# EAGLE board weather-sensor-panel (EAGLE 9.4.2)
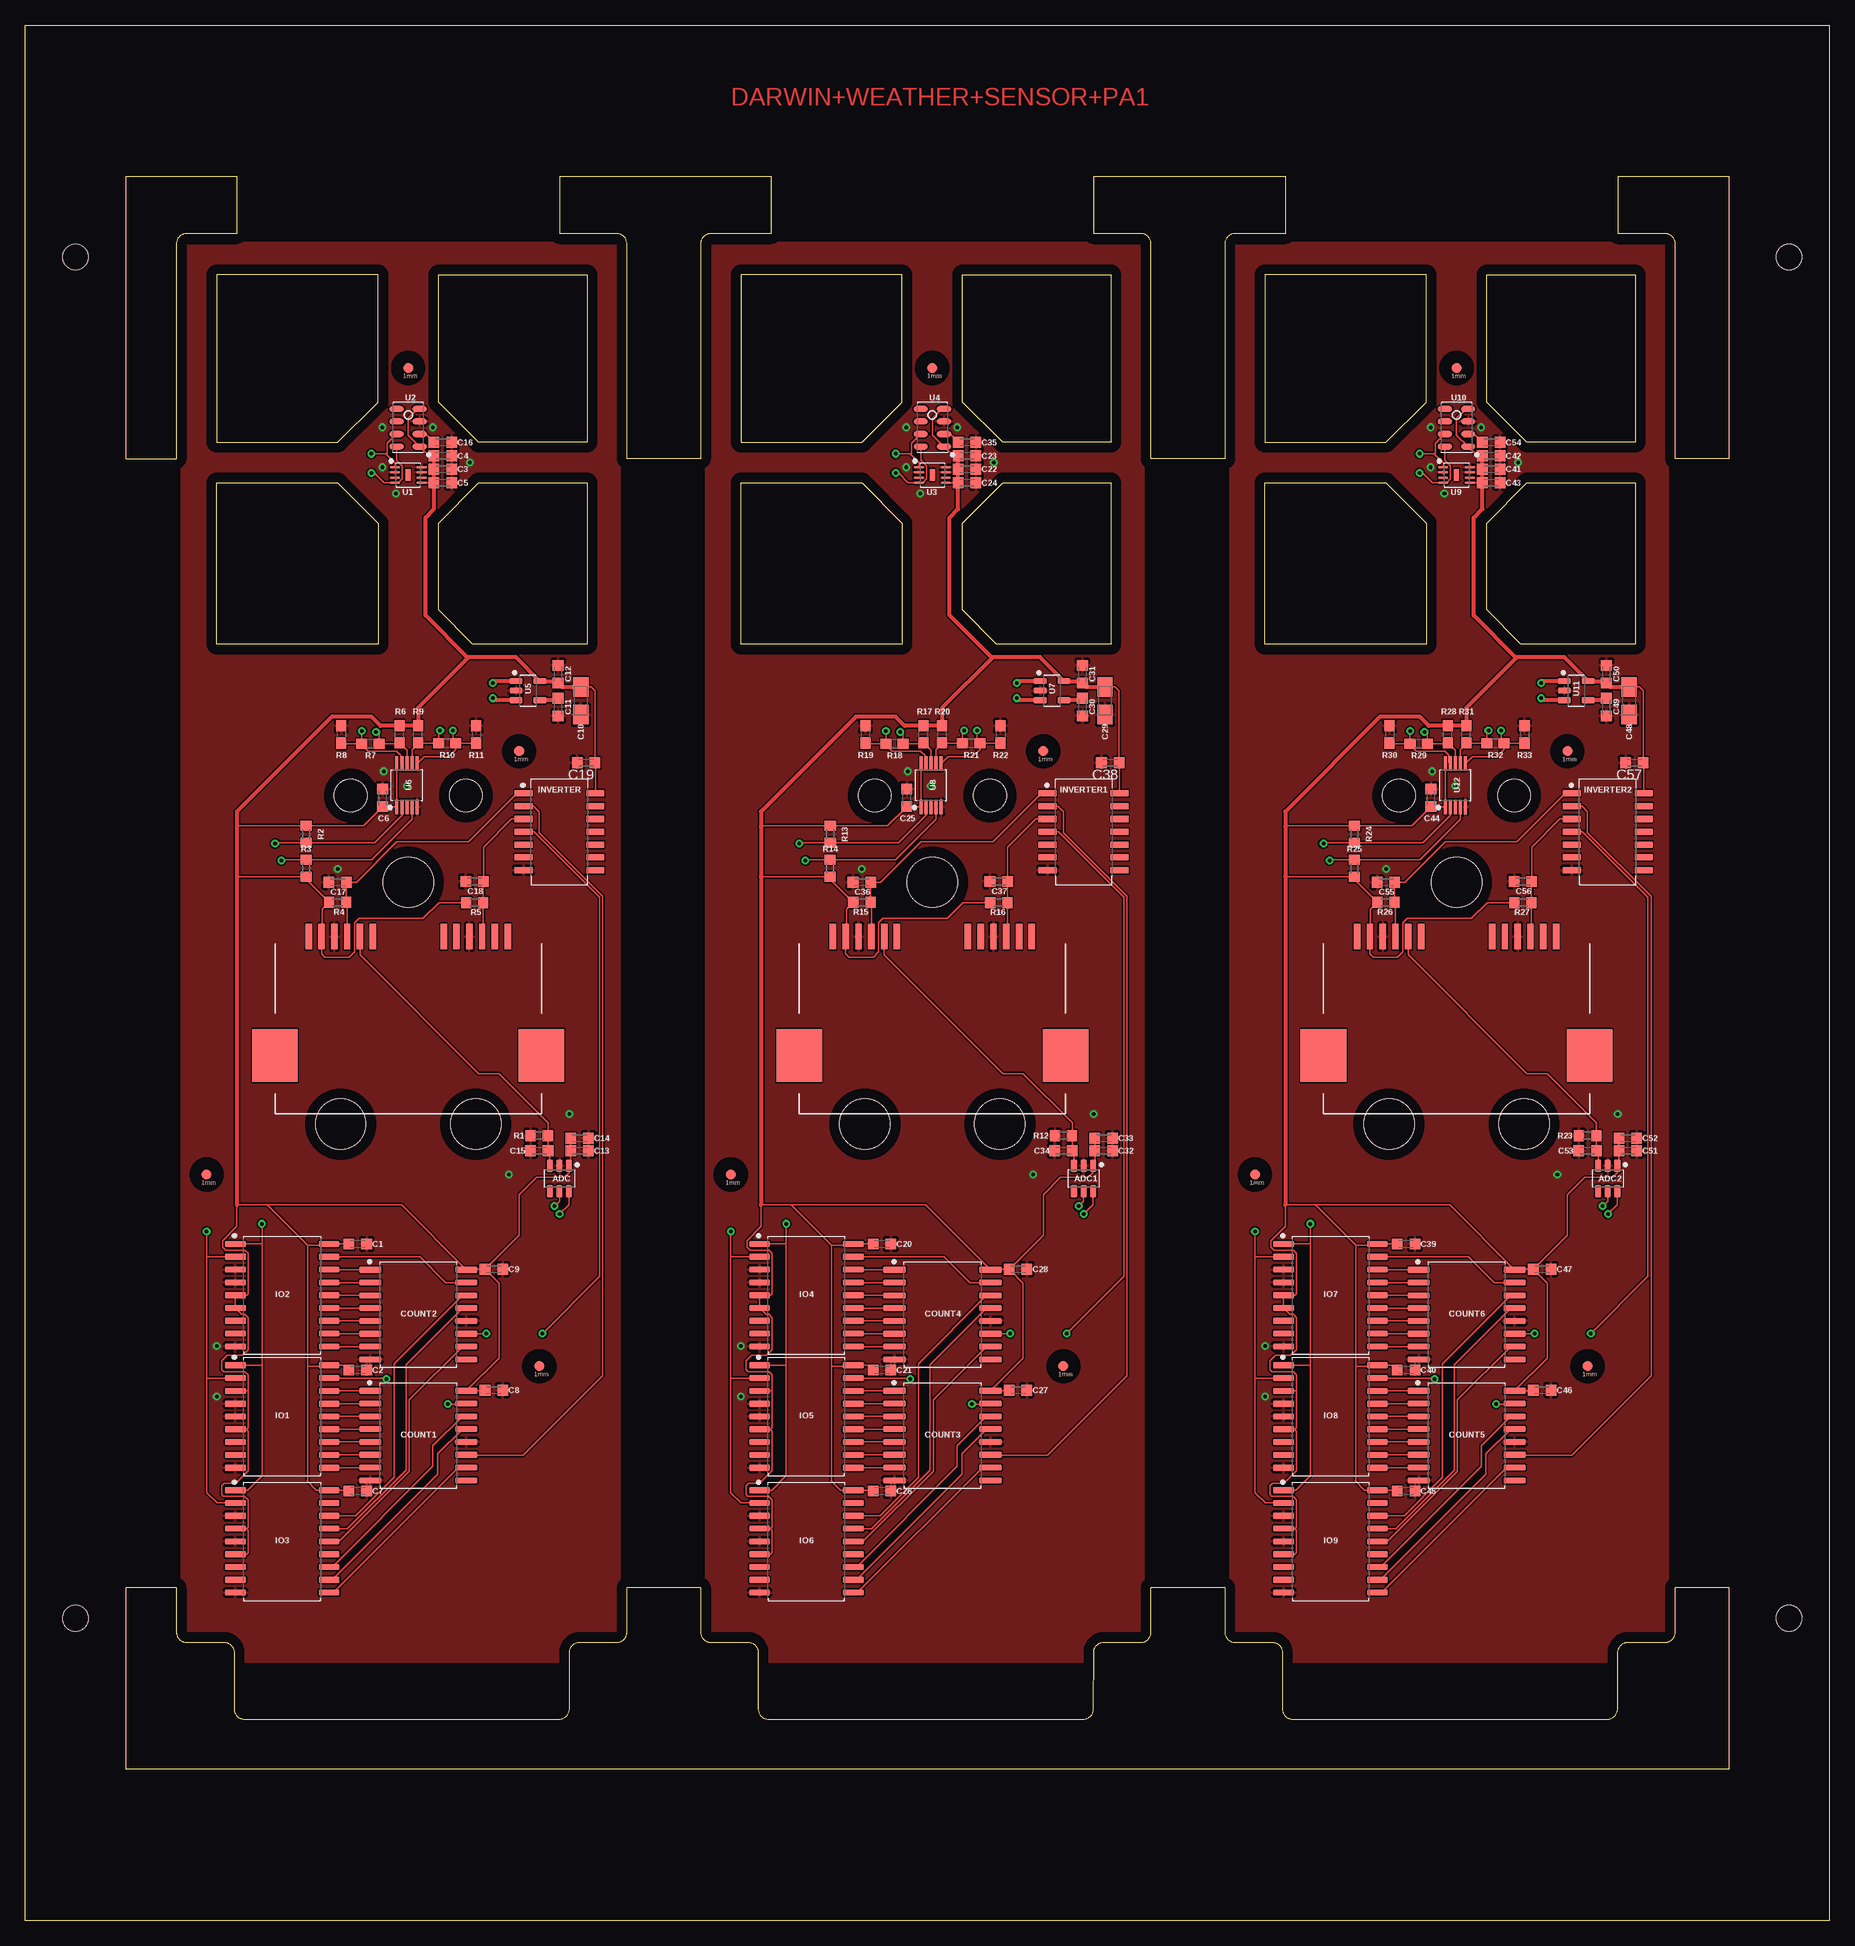
[diagram p0: board, top side]
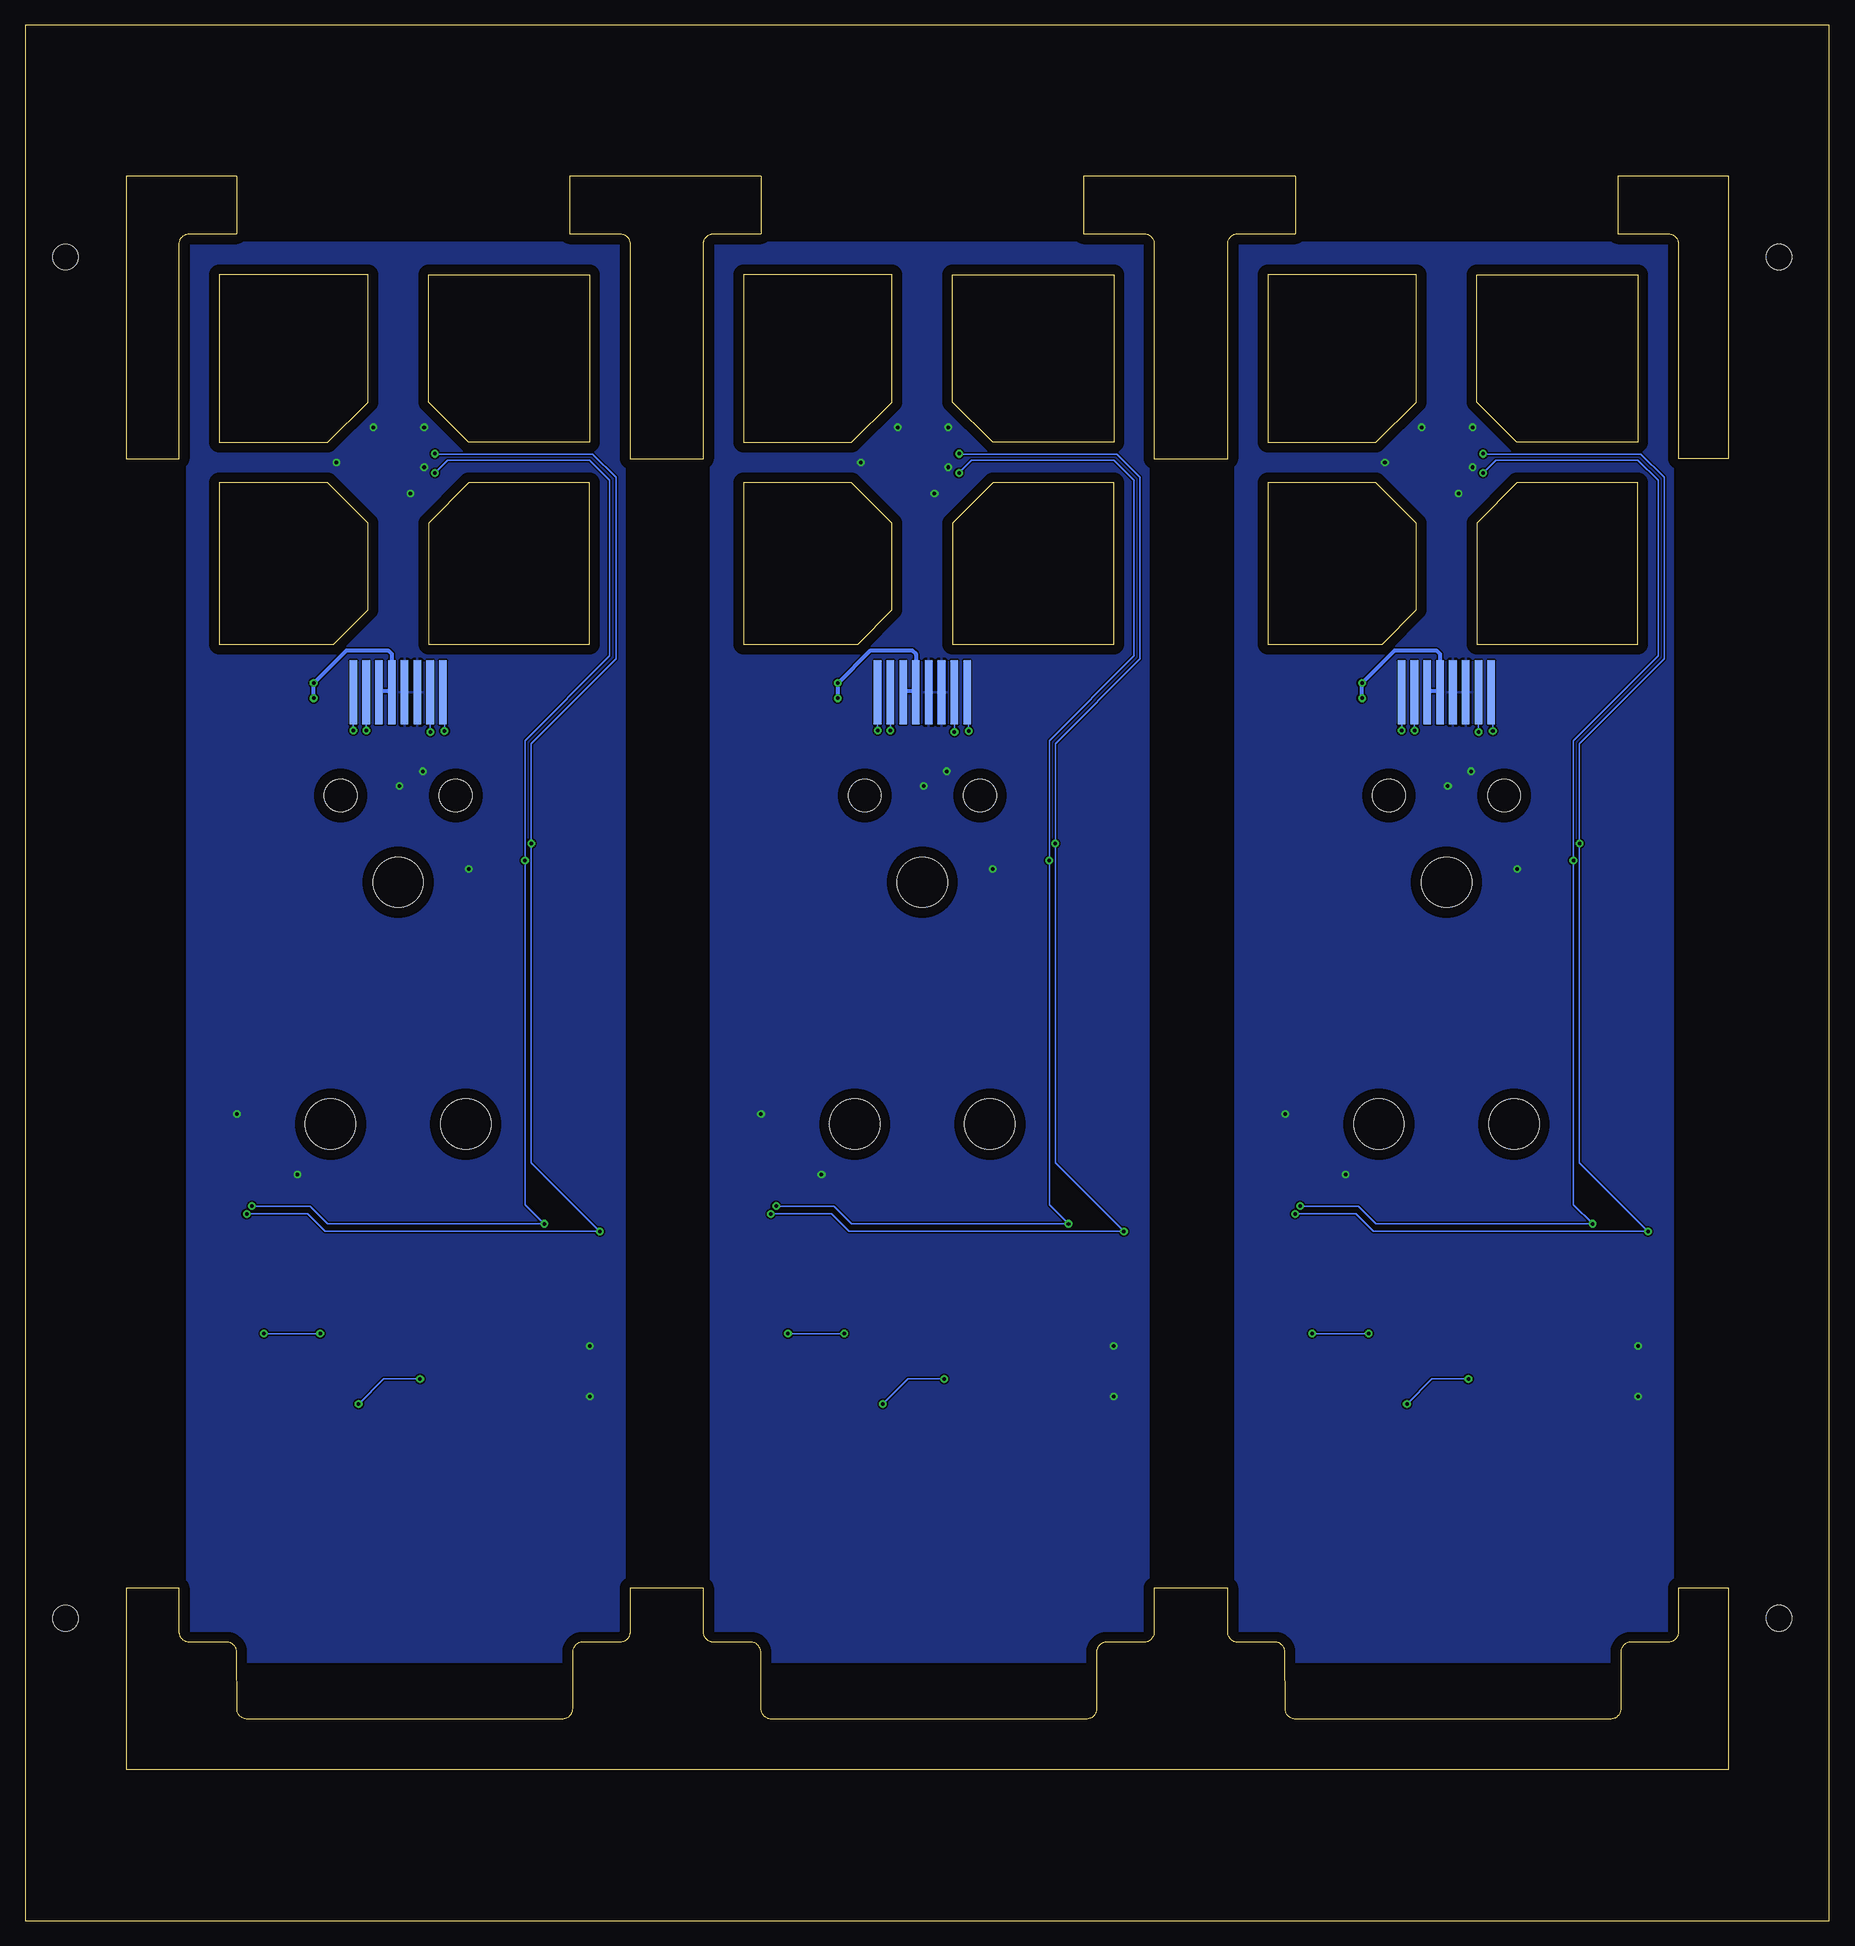
[diagram p1: board, bottom side, seen from below]

Size 179 x 188 mm. Coordinates in mm from the lower left corner, seen from the top.
Outline: 147 segments
Copper layers (1*16): Top 0.035mm / dielectric 1.5mm / Bottom 0.035mm
Design rules "default *": minimum track width 6mil, minimum drill 0.35mm, track to track 6mil, track to pad 6mil, pad to pad 6mil, via to via 6mil, smd to smd 6mil, copper to edge 40mil, drill to drill 6mil, minimum pad ring 10mil, minimum via ring 8mil, stop-mask expansion 4mil, vias tented up to drill 0.35mm, thermal gap 10mil
Holes 5 mm at 38,103 31.3,79 44.7,79 90,103 83.3,79 96.7,79 142,103 135.3,79 148.7,79
Holes 2.54 mm at 5,165 175,165 5,30 175,30

## Footprints (pad centres in the part's own frame; a part is rotated, then mirrored left to right if it is on the bottom)
SOP95P280X110-6 = smd 1.25 x 0.602: 1 -1.256,0.95; 2 -1.256,0; 3 -1.256,-0.95; 4 1.256,-0.95; 5 1.256,0; 6 1.256,0.95
C0603K = smd 1.05 x 1.08: 1 -0.875,0; 2 0.875,0
A/3216-18R = smd 1.95 x 1.5: + 1.375,0; - -1.375,0
SOIC127P1050X265-16 = smd 2.187 x 0.602: 1 -4.76,4.445; 2 -4.76,3.175; 3 -4.76,1.905; 4 -4.76,0.635; 5 -4.76,-0.635; 6 -4.76,-1.905; 7 -4.76,-3.175; 8 -4.76,-4.445; 9 4.76,-4.445; 10 4.76,-3.175; 11 4.76,-1.905; 12 4.76,-0.635; 13 4.76,0.635; 14 4.76,1.905; 15 4.76,3.175; 16 4.76,4.445
FIDUCIAL-1X2.5 = smd 1 x 1: 1 0,0
SOIC127P780X200-14 = smd 1.774 x 0.605: 1 -3.567,3.81; 2 -3.567,2.54; 3 -3.567,1.27; 4 -3.567,0; 5 -3.567,-1.27; 6 -3.567,-2.54; 7 -3.567,-3.81; 8 3.567,-3.81; 9 3.567,-2.54; 10 3.567,-1.27; 11 3.567,0; 12 3.567,1.27; 13 3.567,2.54; 14 3.567,3.81
SOIC18-W = smd 2.052 x 0.602: 1 -4.654,5.08; 2 -4.654,3.81; 3 -4.654,2.54; 4 -4.654,1.27; 5 -4.654,0; 6 -4.654,-1.27; 7 -4.654,-2.54; 8 -4.654,-3.81; 9 -4.654,-5.08; 10 4.654,-5.08; 11 4.654,-3.81; 12 4.654,-2.54; 13 4.654,-1.27; 14 4.654,0; 15 4.654,1.27; 16 4.654,2.54; 17 4.654,3.81; 18 4.654,5.08
43841-0005 = smd 0.63 x 2.54: A1 -9.87,17.58; A2 -8.6,17.58; A3 -7.33,17.58; A4 -6.06,17.58; A5 -4.79,17.58; A6 -3.52,17.58; B1 3.52,17.58; B2 4.79,17.58; B3 6.06,17.58; B4 7.33,17.58; B5 8.6,17.58; B6 9.87,17.58 | smd 4.52 x 5.21: PAD1 -13.21,5.785; PAD2 13.21,5.785
95501-6889 = smd 0.76 x 6.35: 1 -4.445,10.225; 2 -3.175,10.225; 3 -1.905,10.225; 4 -0.635,10.225; 5 0.635,10.225; 6 1.905,10.225; 7 3.175,10.225; 8 4.445,10.225 | hole 3.25: -5.715,0; 5.715,0
R0603 = smd 1 x 1.1: 1 -0.85,0; 2 0.85,0
0603 = smd 1.1 x 1: 1 -0.85,0; 2 0.85,0
SON50P240X240X80-9T80 = smd 1 x 0.24: 1 -1.323,0.75; 2 -1.323,0.25; 3 -1.323,-0.25; 4 -1.323,-0.75; 5 1.322,-0.75; 6 1.322,-0.25; 7 1.322,0.25; 8 1.322,0.75 | smd 0.508 x 1.143: PAD 0,0
SON125P300X500X110-8 = smd 1.412 x 0.582: 1 -1.15,1.875; 2 -1.15,0.625; 3 -1.15,-0.625; 4 -1.15,-1.875; 5 1.15,-1.875; 6 1.15,-0.625; 7 1.15,0.625; 8 1.15,1.875
SOT95P280X145-5 = smd 1.262 x 0.609: 1 -1.175,0.95; 2 -1.175,0; 3 -1.175,-0.95; 4 1.175,-0.95; 5 1.175,0.95
SOP50P490X110-10 = smd 1.438 x 0.297: 1 -2.145,1; 2 -2.145,0.5; 3 -2.145,0; 4 -2.145,-0.5; 5 -2.145,-1; 6 2.145,-1; 7 2.145,-0.5; 8 2.145,0; 9 2.145,0.5; 10 2.145,1

## Placement (x,y rotation side)
ADC  ADC081C021SOT-DDC  [SOP95P280X110-6]  53,73.62 270 top
ADC1  ADC081C021SOT-DDC  [SOP95P280X110-6]  105,73.62 270 top
ADC2  ADC081C021SOT-DDC  [SOP95P280X110-6]  157,73.62 270 top
C1  [C0603K]  33,67.12 0 top
C2  [C0603K]  33,54.62 0 top
C3  [C0603K]  41.44,143.98 0 top
C4  10uf  [C0603K]  41.44,145.29 0 top
C5  .1uf  [C0603K]  41.44,142.61 0 top
C6  [C0603K]  35.46,111.37 90 top
C7  [C0603K]  33,42.62 180 top
C8  [C0603K]  46.5,52.62 0 top
C9  [C0603K]  46.5,64.62 0 top
C10  6.8uf  [A/3216-18R]  55.12,121 90 top
C11  [C0603K]  52.88,120.37 270 top
C12  .1uf  [C0603K]  52.88,123.63 90 top
C13  .1u  [C0603K]  55,76.37 0 top
C14  4.7u  [C0603K]  55,77.62 0 top
C15  470p  [C0603K]  51,76.37 180 top
C16  .1uf  [C0603K]  41.44,146.62 0 top
C17  [C0603K]  31,103 180 top
C18  [C0603K]  44.59,103.07 180 top
C19  [C0603K]  55.65,114.83 180 top
C20  [C0603K]  85,67.12 0 top
C21  [C0603K]  85,54.62 0 top
C22  [C0603K]  93.44,143.98 0 top
C23  10uf  [C0603K]  93.44,145.29 0 top
C24  .1uf  [C0603K]  93.44,142.61 0 top
C25  [C0603K]  87.46,111.37 90 top
C26  [C0603K]  85,42.62 180 top
C27  [C0603K]  98.5,52.62 0 top
C28  [C0603K]  98.5,64.62 0 top
C29  6.8uf  [A/3216-18R]  107.12,121 90 top
C30  [C0603K]  104.88,120.37 270 top
C31  .1uf  [C0603K]  104.88,123.63 90 top
C32  .1u  [C0603K]  107,76.37 0 top
C33  4.7u  [C0603K]  107,77.62 0 top
C34  470p  [C0603K]  103,76.37 180 top
C35  .1uf  [C0603K]  93.44,146.62 0 top
C36  [C0603K]  83,103 180 top
C37  [C0603K]  96.59,103.07 180 top
C38  [C0603K]  107.65,114.83 180 top
C39  [C0603K]  137,67.12 0 top
C40  [C0603K]  137,54.62 0 top
C41  [C0603K]  145.44,143.98 0 top
C42  10uf  [C0603K]  145.44,145.29 0 top
C43  .1uf  [C0603K]  145.44,142.61 0 top
C44  [C0603K]  139.46,111.37 90 top
C45  [C0603K]  137,42.62 180 top
C46  [C0603K]  150.5,52.62 0 top
C47  [C0603K]  150.5,64.62 0 top
C48  6.8uf  [A/3216-18R]  159.12,121 90 top
C49  [C0603K]  156.88,120.37 270 top
C50  .1uf  [C0603K]  156.88,123.63 90 top
C51  .1u  [C0603K]  159,76.37 0 top
C52  4.7u  [C0603K]  159,77.62 0 top
C53  470p  [C0603K]  155,76.37 180 top
C54  .1uf  [C0603K]  145.44,146.62 0 top
C55  [C0603K]  135,103 180 top
C56  [C0603K]  148.59,103.07 180 top
C57  [C0603K]  159.65,114.83 180 top
COUNT1  74HC590  [SOIC127P1050X265-16]  39,48.12 0 top
COUNT2  74HC590  [SOIC127P1050X265-16]  39,60.12 0 top
COUNT3  74HC590  [SOIC127P1050X265-16]  91,48.12 0 top
COUNT4  74HC590  [SOIC127P1050X265-16]  91,60.12 0 top
COUNT5  74HC590  [SOIC127P1050X265-16]  143,48.12 0 top
COUNT6  74HC590  [SOIC127P1050X265-16]  143,60.12 0 top
FID1  FIDUCIAL1X2.5  [FIDUCIAL-1X2.5]  51,55 0 top
FID2  FIDUCIAL1X2.5  [FIDUCIAL-1X2.5]  49,116 0 top
FID3  FIDUCIAL1X2.5  [FIDUCIAL-1X2.5]  38,154 0 top
FID4  FIDUCIAL1X2.5  [FIDUCIAL-1X2.5]  18,74 0 top
FID5  FIDUCIAL1X2.5  [FIDUCIAL-1X2.5]  103,55 0 top
FID6  FIDUCIAL1X2.5  [FIDUCIAL-1X2.5]  101,116 0 top
FID7  FIDUCIAL1X2.5  [FIDUCIAL-1X2.5]  90,154 0 top
FID8  FIDUCIAL1X2.5  [FIDUCIAL-1X2.5]  70,74 0 top
FID9  FIDUCIAL1X2.5  [FIDUCIAL-1X2.5]  155,55 0 top
FID10  FIDUCIAL1X2.5  [FIDUCIAL-1X2.5]  153,116 0 top
FID11  FIDUCIAL1X2.5  [FIDUCIAL-1X2.5]  142,154 0 top
FID12  FIDUCIAL1X2.5  [FIDUCIAL-1X2.5]  122,74 0 top
INVERTER  74HC14  [SOIC127P780X200-14]  53,108 0 top
INVERTER1  74HC14  [SOIC127P780X200-14]  105,108 0 top
INVERTER2  74HC14  [SOIC127P780X200-14]  157,108 0 top
IO1  MCP23008  [SOIC18-W]  25.5,50.01 0 top
IO2  MCP23008  [SOIC18-W]  25.5,62.04 0 top
IO3  MCP23008  [SOIC18-W]  25.5,37.62 0 top
IO4  MCP23008  [SOIC18-W]  77.5,62.04 0 top
IO5  MCP23008  [SOIC18-W]  77.5,50.01 0 top
IO6  MCP23008  [SOIC18-W]  77.5,37.62 0 top
IO7  MCP23008  [SOIC18-W]  129.5,62.04 0 top
IO8  MCP23008  [SOIC18-W]  129.5,50.01 0 top
IO9  MCP23008  [SOIC18-W]  129.5,37.62 0 top
J1  43841-0005  [43841-0005]  38,80.02 0 top
J2  95501-6889  [95501-6889]  38,111.61 0 bottom
J3  95501-6889  [95501-6889]  90,111.61 0 bottom
J4  43841-0005  [43841-0005]  90,80.02 0 top
J5  95501-6889  [95501-6889]  142,111.61 0 bottom
J6  43841-0005  [43841-0005]  142,80.02 0 top
R1  10k  [R0603]  51,77.87 0 top
R2  4.7K  [R0603]  27.87,107.75 270 top
R3  4.7K  [R0603]  27.86,104.39 270 top
R4  [R0603]  31,101 180 top
R5  [R0603]  44.59,100.98 180 top
R6  330  [0603]  37.13,117.67 90 top
R7  100  [0603]  34.25,116.74 0 top
R8  300  [0603]  31.35,117.66 270 top
R9  330  [0603]  38.97,117.67 90 top
R10  100  [0603]  41.86,116.77 180 top
R11  300  [0603]  44.75,117.66 270 top
R12  10k  [R0603]  103,77.87 0 top
R13  4.7K  [R0603]  79.87,107.75 270 top
R14  4.7K  [R0603]  79.86,104.39 270 top
R15  [R0603]  83,101 180 top
R16  [R0603]  96.59,100.98 180 top
R17  330  [0603]  89.13,117.67 90 top
R18  100  [0603]  86.25,116.74 0 top
R19  300  [0603]  83.35,117.66 270 top
R20  330  [0603]  90.97,117.67 90 top
R21  100  [0603]  93.86,116.77 180 top
R22  300  [0603]  96.75,117.66 270 top
R23  10k  [R0603]  155,77.87 0 top
R24  4.7K  [R0603]  131.87,107.75 270 top
R25  4.7K  [R0603]  131.86,104.39 270 top
R26  [R0603]  135,101 180 top
R27  [R0603]  148.59,100.98 180 top
R28  330  [0603]  141.13,117.67 90 top
R29  100  [0603]  138.25,116.74 0 top
R30  300  [0603]  135.35,117.66 270 top
R31  330  [0603]  142.97,117.67 90 top
R32  100  [0603]  145.86,116.77 180 top
R33  300  [0603]  148.75,117.66 270 top
U1  SHT31  [SON50P240X240X80-9T80]  38,143.39 0 top
U2  MPL3115A2LGA8  [SON125P300X500X110-8]  38,148.08 180 top
U3  SHT31  [SON50P240X240X80-9T80]  90,143.39 0 top
U4  MPL3115A2LGA8  [SON125P300X500X110-8]  90,148.08 180 top
U5  MIC5219-3.3YM5-TR  [SOT95P280X145-5]  49.88,122 0 top
U6  PCA9615  [SOP50P490X110-10]  37.87,112.62 90 top
U7  MIC5219-3.3YM5-TR  [SOT95P280X145-5]  101.88,122 0 top
U8  PCA9615  [SOP50P490X110-10]  89.87,112.62 90 top
U9  SHT31  [SON50P240X240X80-9T80]  142,143.39 0 top
U10  MPL3115A2LGA8  [SON125P300X500X110-8]  142,148.08 180 top
U11  MIC5219-3.3YM5-TR  [SOT95P280X145-5]  153.88,122 0 top
U12  PCA9615  [SOP50P490X110-10]  141.87,112.62 90 top

## Library data of the parts
ADC ADC1 ADC2 COUNT1-COUNT6 INVERTER INVERTER1 INVERTER2 IO1-IO9 J1-J6 U1-U12 = Conservify
C1-C57 = rcl; SPICEPREFIX: C
FID1-FID12 = microbuilder; BOM: EXCLUDE
R1-R5 R12-R16 R23-R27 = rcl; SPICEPREFIX: R
R6-R11 R17-R22 R28-R33 = SparkFun-Resistors; PROD_ID: RES-07828

## Nets
2CCLR: COUNT2.10 IO3.14
2CCLR1: COUNT4.10 IO6.14
2CCLR2: COUNT6.10 IO9.14
2OE: COUNT2.14 IO3.16
2OE1: COUNT4.14 IO6.16
2OE2: COUNT6.14 IO9.16
2RCLK: COUNT2.13 IO3.15
2RCLK1: COUNT4.13 IO6.15
2RCLK2: COUNT6.13 IO9.15
3V1: ADC1.1 C20.1 C21.1 C22.1 C23.1 C24.1 C25.1 C26.2 C27.1 C28.1 C29.+ C31.1 C32.1 C33.1 C38.1 COUNT3.16 COUNT4.16 INVERTER1.14 IO4.5 IO4.6 IO4.18 IO5.3 IO5.6 IO5.18 IO6.4 IO6.6 IO6.18 J4.A2 R13.1 R14.2 R15.2 R16.2 R17.2 R20.2 U3.5 U4.1 U4.4 U7.5 U8.1 U8.10
3V2: ADC2.1 C39.1 C40.1 C41.1 C42.1 C43.1 C44.1 C45.2 C46.1 C47.1 C48.+ C50.1 C51.1 C52.1 C57.1 COUNT5.16 COUNT6.16 INVERTER2.14 IO7.5 IO7.6 IO7.18 IO8.3 IO8.6 IO8.18 IO9.4 IO9.6 IO9.18 J6.A2 R24.1 R25.2 R26.2 R27.2 R28.2 R31.2 U9.5 U10.1 U10.4 U11.5 U12.1 U12.10
3V3: ADC.1 C1.1 C2.1 C3.1 C4.1 C5.1 C6.1 C7.2 C8.1 C9.1 C10.+ C12.1 C13.1 C14.1 C19.1 COUNT1.16 COUNT2.16 INVERTER.14 IO1.3 IO1.6 IO1.18 IO2.5 IO2.6 IO2.18 IO3.4 IO3.6 IO3.18 J1.A2 R2.1 R3.2 R4.2 R5.2 R6.2 R9.2 U1.5 U2.1 U2.4 U5.5 U6.1 U6.10
!ANEM: COUNT1.11 INVERTER.2
!ANEM1: COUNT3.11 INVERTER1.2
!ANEM2: COUNT5.11 INVERTER2.2
!RAIN: COUNT2.11 INVERTER.4
!RAIN1: COUNT4.11 INVERTER1.4
!RAIN2: COUNT6.11 INVERTER2.4
ANEM: C17.1 INVERTER.1 J1.A4 R4.1
ANEM1: C36.1 INVERTER1.1 J4.A4 R15.1
ANEM2: C55.1 INVERTER2.1 J6.A4 R26.1
CAP: C16.1 U2.2
CAP1: C35.1 U4.2
CAP2: C54.1 U10.2
EN: U6.3
EN1: U8.3
EN2: U12.3
GND: ADC.2 C1.2 C2.2 C3.2 C4.2 C5.2 C6.2 C7.1 C8.2 C9.2 C10.- C11.2 C12.2 C13.2 C14.2 C15.2 C16.2 C17.2 C18.2 C19.2 COUNT1.8 COUNT1.12 COUNT2.8 COUNT2.12 INVERTER.7 IO1.4 IO1.5 IO1.9 IO2.3 IO2.4 IO2.9 IO3.3 IO3.5 IO3.9 J1.A3 J1.B3 J2.5 J2.6 R1.1 R8.1 R11.1 U1.2 U1.7 U1.8 U2.3 U5.2 U6.5
GND1: ADC1.2 C20.2 C21.2 C22.2 C23.2 C24.2 C25.2 C26.1 C27.2 C28.2 C29.- C30.2 C31.2 C32.2 C33.2 C34.2 C35.2 C36.2 C37.2 C38.2 COUNT3.8 COUNT3.12 COUNT4.8 COUNT4.12 INVERTER1.7 IO4.3 IO4.4 IO4.9 IO5.4 IO5.5 IO5.9 IO6.3 IO6.5 IO6.9 J3.5 J3.6 J4.A3 J4.B3 R12.1 R19.1 R22.1 U3.2 U3.7 U3.8 U4.3 U7.2 U8.5
GND2: ADC2.2 C39.2 C40.2 C41.2 C42.2 C43.2 C44.2 C45.1 C46.2 C47.2 C48.- C49.2 C50.2 C51.2 C52.2 C53.2 C54.2 C55.2 C56.2 C57.2 COUNT5.8 COUNT5.12 COUNT6.8 COUNT6.12 INVERTER2.7 IO7.3 IO7.4 IO7.9 IO8.4 IO8.5 IO8.9 IO9.3 IO9.5 IO9.9 J5.5 J5.6 J6.A3 J6.B3 R23.1 R30.1 R33.1 U9.2 U9.7 U9.8 U10.3 U11.2 U12.5
LCL-M: J2.1 R10.1 R11.2 U6.6
LCL-M1: J3.1 R21.1 R22.2 U8.6
LCL-M2: J5.1 R32.1 R33.2 U12.6
LCL-P: J2.2 R9.1 R10.2 U6.7
LCL-P1: J3.2 R20.1 R21.2 U8.7
LCL-P2: J5.2 R31.1 R32.2 U12.7
LDA-M: J2.8 R7.1 R8.2 U6.9
LDA-M1: J3.8 R18.1 R19.2 U8.9
LDA-M2: J5.8 R29.1 R30.2 U12.9
LDA-P: J2.7 R6.1 R7.2 U6.8
LDA-P1: J3.7 R17.1 R18.2 U8.8
LDA-P2: J5.7 R28.1 R29.2 U12.8
N$1: COUNT2.15 IO2.17
N$2: COUNT2.1 IO2.16
N$3: COUNT2.2 IO2.15
N$4: COUNT2.3 IO2.14
N$5: COUNT2.4 IO2.13
N$6: COUNT2.5 IO2.12
N$7: COUNT2.6 IO2.11
N$8: COUNT2.7 IO2.10
N$9: COUNT1.15 IO1.17
N$10: COUNT1.1 IO1.16
N$11: COUNT4.15 IO4.17
N$12: COUNT1.2 IO1.15
N$13: COUNT1.3 IO1.14
N$14: COUNT1.4 IO1.13
N$15: COUNT1.5 IO1.12
N$16: COUNT1.6 IO1.11
N$17: COUNT1.7 IO1.10
N$18: COUNT1.14 IO3.12
N$19: COUNT1.13 IO3.11
N$20: COUNT1.10 IO3.10
N$21: COUNT4.1 IO4.16
N$22: COUNT4.2 IO4.15
N$23: C11.1 U5.4
N$24: COUNT4.3 IO4.14
N$25: COUNT4.4 IO4.13
N$26: COUNT4.5 IO4.12
N$27: COUNT4.6 IO4.11
N$28: COUNT4.7 IO4.10
N$29: COUNT3.15 IO5.17
N$30: COUNT3.1 IO5.16
N$31: COUNT3.2 IO5.15
N$32: COUNT3.3 IO5.14
N$33: COUNT3.4 IO5.13
N$34: COUNT3.5 IO5.12
N$35: COUNT3.6 IO5.11
N$36: COUNT3.7 IO5.10
N$37: COUNT3.14 IO6.12
N$38: COUNT3.13 IO6.11
N$39: COUNT3.10 IO6.10
N$40: C30.1 U7.4
N$41: COUNT6.15 IO7.17
N$42: COUNT6.1 IO7.16
N$43: COUNT6.2 IO7.15
N$44: COUNT6.3 IO7.14
N$45: COUNT6.4 IO7.13
N$46: COUNT6.5 IO7.12
N$47: COUNT6.6 IO7.11
N$48: COUNT6.7 IO7.10
N$49: COUNT5.15 IO8.17
N$50: COUNT5.1 IO8.16
N$51: COUNT5.2 IO8.15
N$52: COUNT5.3 IO8.14
N$53: COUNT5.4 IO8.13
N$54: COUNT5.5 IO8.12
N$55: COUNT5.6 IO8.11
N$56: COUNT5.7 IO8.10
N$57: COUNT5.14 IO9.12
N$58: COUNT5.13 IO9.11
N$59: COUNT5.10 IO9.10
N$60: C49.1 U11.4
RAIN: C18.1 INVERTER.3 J1.B4 R5.1
RAIN1: C37.1 INVERTER1.3 J4.B4 R16.1
RAIN2: C56.1 INVERTER2.3 J6.B4 R27.1
SCL: ADC.5 IO1.1 IO2.1 IO3.1 R3.1 U1.4 U2.8 U6.4
SCL1: ADC1.5 IO4.1 IO5.1 IO6.1 R14.1 U3.4 U4.8 U8.4
SCL2: ADC2.5 IO7.1 IO8.1 IO9.1 R25.1 U9.4 U10.8 U12.4
SDA: ADC.6 IO1.2 IO2.2 IO3.2 R2.2 U1.1 U2.7 U6.2
SDA1: ADC1.6 IO4.2 IO5.2 IO6.2 R13.2 U3.1 U4.7 U8.2
SDA2: ADC2.6 IO7.2 IO8.2 IO9.2 R24.2 U9.1 U10.7 U12.2
UNREG: J2.3 J2.4 U5.1 U5.3
UNREG1: J3.3 J3.4 U7.1 U7.3
UNREG2: J5.3 J5.4 U11.1 U11.3
VANE: ADC.3 C15.1 J1.A5 R1.2
VANE1: ADC1.3 C34.1 J4.A5 R12.2
VANE2: ADC2.3 C53.1 J6.A5 R23.2

## Tracks (layer width: path | path; a pad name or v marks a point on that pad's centre or on a via)
2CCLR
  Top 0.152: COUNT2.10 43.38,56.95 38.09,51.65 38.09,44.58 31.12,37.62 IO3.14
2CCLR1
  Top 0.152: COUNT4.10 95.38,56.95 90.09,51.65 90.09,44.58 83.12,37.62 IO6.14
2CCLR2
  Top 0.152: COUNT6.10 147.38,56.95 142.09,51.65 142.09,44.58 135.12,37.62 IO9.14
2OE
  Top 0.152: COUNT2.14 43.38,62.02 36.62,55.26 36.62,43.97 32.8,40.16 IO3.16
2OE1
  Top 0.152: COUNT4.14 95.38,62.02 88.62,55.26 88.62,43.97 84.8,40.16 IO6.16
2OE2
  Top 0.152: COUNT6.14 147.38,62.02 140.62,55.26 140.62,43.97 136.8,40.16 IO9.16
2RCLK
  Top 0.152: COUNT2.13 43.38,60.76 37.77,55.14 37.77,44.7 31.96,38.89 IO3.15
2RCLK1
  Top 0.152: COUNT4.13 95.38,60.76 89.77,55.14 89.77,44.7 83.96,38.89 IO6.15
2RCLK2
  Top 0.152: COUNT6.13 147.38,60.76 141.77,55.14 141.77,44.7 135.96,38.89 IO9.15
3V1
  Top 0.152: C23.1 92.57,145 92.36,145 U4.1 90,147.36 90,149 90.95,149.96 U4.4 | U3.5 92.54,142.64 C24.1 | 73,108.52 73.08,108.6 R13.1 85.57,108.6 C25.1 87.48,110.47 U8.1 U8.10 | 73,103.57 73.03,103.54 R14.2 79.86,103.29 R15.2 81.48,100.33 81.48,97.68 J4.A2 81.4,95.9 81.73,95.56 84.14,95.56 84.67,96.09 84.67,98.97 85.11,99.41 91.49,99.41 93.06,100.98 R16.2 96.08,100.64 | 74.1,52.51 74.1,54.14 73.8,54.45 71.71,54.45 71.49,54.66 71.49,55.51 72.05,56.07 73.53,56.07 74.1,56.64 74.1,59.83 73.8,60.13 73.49,60.13 IO4.6 IO4.5 73.96,62.04 74.1,62.19 74.1,66.18 73.8,66.48 71.91,66.48 71.59,66.8 71.59,67.45 73,68.85 73,71 76,71 | 74.1,52.51 74.1,48.88 73.96,48.74 IO5.6 73.91,48.74 74.1,48.54 74.1,44.6 72.88,43.38 71.75,43.38 71.49,43.12 71.49,42.27 71.66,42.11 73.75,42.11 74.1,41.75 74.1,39.03 73.96,38.89 | 73.96,38.89 IO6.4 | 73.96,38.89 74.1,38.75 74.1,36.5 73.96,36.35 IO6.6 | 76,71 80,67 | 80,67 80,55 | 80,55 80,43.67 79.95,43.62 80.88,42.7 IO6.18 84.05,42.7 C26.2 | 80,55 82.06,55 IO5.18 83.66,55.09 C21.1 | 80,67 82.03,67 IO4.18 C20.1 | C28.1 95.81,64.62 COUNT4.16 89.33,71 76,71 | C27.1 97.57,52.56 COUNT3.16 99,55.8 99,63.24 C28.1 | C28.1 101,68 101,72 102.72,73.72 105.48,73.72 105.95,74.19 ADC1.1 106.12,75.05 C32.1 C33.1 | INVERTER1.14 108.57,114.79 C38.1 108.52,121.99 108.14,122.38 107,122.38 | IO5.3 74.06,52.55 74.1,52.51
  Top 0.406: C29.+ 107,122.38 105.26,122.38 C31.1 104.68,122.95 U7.5 100.68,125.33 96,125.33 | 96,125.33 95.84,125.33 91.7,129.46 91.7,139.16 92.57,140.02 C24.1 C22.1 92.57,145 | 96,125.33 90.97,120.3 R20.2 R17.2 87.25,118.52 86.35,119.42 82.42,119.42 73,110 73,108.52 73,103.57 73,71
3V2
  Top 0.152: C42.1 144.56,145 144.35,145 U10.1 142,147.36 142,149 142.95,149.96 U10.4 | U9.5 144.54,142.64 C43.1 | 125,108.52 125.08,108.6 R24.1 137.57,108.6 C44.1 139.48,110.47 U12.1 U12.10 | 125,103.57 125.03,103.54 R25.2 131.86,103.29 R26.2 133.48,100.33 133.48,97.68 J6.A2 133.4,95.9 133.73,95.56 136.14,95.56 136.67,96.09 136.67,98.97 137.11,99.41 143.49,99.41 145.06,100.98 R27.2 148.08,100.64 | 126.1,52.51 126.1,54.14 125.8,54.45 123.71,54.45 123.49,54.66 123.49,55.51 124.05,56.07 125.53,56.07 126.1,56.64 126.1,59.83 125.8,60.13 125.49,60.13 IO7.6 IO7.5 125.96,62.04 126.1,62.19 126.1,66.18 125.8,66.48 123.91,66.48 123.59,66.8 123.59,67.45 125,68.85 125,71 128,71 | 126.1,52.51 126.1,48.88 125.96,48.74 IO8.6 125.91,48.74 126.1,48.54 126.1,44.6 124.88,43.38 123.75,43.38 123.49,43.12 123.49,42.27 123.66,42.11 125.75,42.11 126.1,41.75 126.1,39.03 125.96,38.89 | 125.96,38.89 IO9.4 | 125.96,38.89 126.1,38.75 126.1,36.5 125.96,36.35 IO9.6 | 128,71 132,67 | 132,67 132,55 | 132,55 132,43.67 131.95,43.62 132.88,42.7 IO9.18 136.05,42.7 C45.2 | 132,55 134.06,55 IO8.18 135.66,55.09 C40.1 | 132,67 134.03,67 IO7.18 C39.1 | C47.1 147.81,64.62 COUNT6.16 141.32,71 128,71 | C46.1 149.57,52.56 COUNT5.16 151,55.8 151,63.24 C47.1 | C47.1 153,68 153,72 154.72,73.72 157.48,73.72 157.95,74.19 ADC2.1 158.12,75.05 C51.1 C52.1 | INVERTER2.14 160.57,114.79 C57.1 160.52,121.99 160.13,122.38 159,122.38 | IO8.3 126.06,52.55 126.1,52.51
  Top 0.406: C48.+ 159,122.38 157.26,122.38 C50.1 156.68,122.95 U11.5 152.68,125.33 148,125.33 | 148,125.33 147.84,125.33 143.71,129.46 143.71,139.16 144.56,140.02 C43.1 C41.1 144.56,145 | 148,125.33 142.97,120.3 R31.2 R28.2 139.25,118.52 138.35,119.42 134.42,119.42 125,110 125,108.52 125,103.57 125,71
3V3
  Top 0.152: C4.1 40.57,145 40.36,145 U2.1 38,147.36 38,149 38.95,149.96 U2.4 | U1.5 40.54,142.64 C5.1 | 21,108.52 21.08,108.6 R2.1 33.57,108.6 C6.1 35.48,110.47 U6.1 U6.10 | 21,103.57 21.03,103.54 R3.2 27.86,103.29 R4.2 29.48,100.33 29.48,97.68 J1.A2 29.4,95.9 29.73,95.56 32.14,95.56 32.67,96.09 32.67,98.97 33.11,99.41 39.49,99.41 41.06,100.98 R5.2 44.08,100.64 | 22.1,52.51 22.1,54.14 21.8,54.45 19.71,54.45 19.49,54.66 19.49,55.51 20.05,56.07 21.53,56.07 22.1,56.64 22.1,59.83 21.8,60.13 21.49,60.13 IO2.6 IO2.5 21.96,62.04 22.1,62.19 22.1,66.18 21.8,66.48 19.91,66.48 19.59,66.8 19.59,67.45 21,68.85 21,71 24,71 | 22.1,52.51 22.1,48.88 21.96,48.74 IO1.6 21.91,48.74 22.1,48.54 22.1,44.6 20.88,43.38 19.75,43.38 19.49,43.12 19.49,42.27 19.66,42.11 21.75,42.11 22.1,41.75 22.1,39.03 21.96,38.89 | 21.96,38.89 IO3.4 | 21.96,38.89 22.1,38.75 22.1,36.5 21.96,36.35 IO3.6 | 24,71 28,67 | 28,67 28,55 | 28,55 28,43.67 27.95,43.62 28.88,42.7 IO3.18 32.05,42.7 C7.2 | 28,55 30.06,55 IO1.18 31.66,55.09 C2.1 | 28,67 30.03,67 IO2.18 C1.1 | C9.1 43.81,64.62 COUNT2.16 37.33,71 24,71 | C8.1 45.57,52.56 COUNT1.16 47,55.8 47,63.24 C9.1 | C9.1 49,68 49,72 50.72,73.72 53.48,73.72 53.95,74.19 ADC.1 54.12,75.05 C13.1 C14.1 | INVERTER.14 56.57,114.79 C19.1 56.52,121.99 56.13,122.38 55,122.38 | IO1.3 22.06,52.55 22.1,52.51
  Top 0.406: C10.+ 55,122.38 53.26,122.38 C12.1 52.68,122.95 U5.5 48.68,125.33 44,125.33 | 44,125.33 43.84,125.33 39.7,129.46 39.7,139.16 40.57,140.02 C5.1 C3.1 40.57,145 | 44,125.33 38.97,120.3 R9.2 R6.2 35.25,118.52 34.35,119.42 30.41,119.42 21,110 21,108.52 21,103.57 21,71
!ANEM
  Top 0.152: INVERTER.2 50.46,110.54 51,110 51,107.92 57.3,101.62 57.3,54.05 49.42,46.16 43.81,46.16 COUNT1.11
!ANEM1
  Top 0.152: INVERTER1.2 102.46,110.54 103,110 103,107.92 109.31,101.62 109.31,54.05 101.42,46.16 95.81,46.16 COUNT3.11
!ANEM2
  Top 0.152: INVERTER2.2 154.46,110.54 155,110 155,107.92 161.31,101.62 161.31,54.05 153.42,46.16 147.81,46.16 COUNT5.11
!RAIN  (via drill 0.35)
  Top 0.152: INVERTER.4 50.49,108 57,101.49 57,63.91 v51.32,58.23 | v45.73,58.23 45.72,58.22 COUNT2.11
  Bottom 0.152: v51.32,58.23 v45.73,58.23
!RAIN1  (via drill 0.35)
  Top 0.152: INVERTER1.4 102.49,108 109,101.49 109,63.91 v103.32,58.23 | v97.73,58.23 97.72,58.22 COUNT4.11
  Bottom 0.152: v103.32,58.23 v97.73,58.23
!RAIN2  (via drill 0.35)
  Top 0.152: INVERTER2.4 154.49,108 161,101.49 161,63.91 v155.32,58.23 | v149.73,58.23 149.72,58.22 COUNT6.11
  Bottom 0.152: v155.32,58.23 v149.73,58.23
ANEM
  Top 0.152: J1.A4 31.94,100.91 R4.1 31.85,102.97 C17.1 32.88,103 36.88,107 44,107 49,112 49.24,112 INVERTER.1
ANEM1
  Top 0.152: J4.A4 83.94,100.91 R15.1 83.85,102.97 C36.1 84.88,103 88.88,107 96,107 101,112 101.24,112 INVERTER1.1
ANEM2
  Top 0.152: J6.A4 135.94,100.91 R26.1 135.85,102.97 C55.1 136.88,103 140.88,107 148,107 153,112 153.24,112 INVERTER2.1
CAP
  Top 0.152: U2.2 39.73,147.45 C16.1
CAP1
  Top 0.152: U4.2 91.73,147.45 C35.1
CAP2
  Top 0.152: U10.2 143.73,147.45 C54.1
GND  (via drill 0.35)
  other vias: 40.45,148.12 35.42,148.12 35.42,144.16 44.11,144.62 36.79,141.57 19,57 19,52 54,80 48,74 31,104.33 37.86,112.53 35.56,114
  pour Top: 15.5,166.47 15.5,25.62 59,25.62 59,166.47
  pour Bottom: 15.5,166.47 15.5,25.62 59,25.62 59,166.47
GND1  (via drill 0.35)
  other vias: 92.45,148.12 87.42,148.12 87.42,144.16 96.11,144.62 88.79,141.57 71,57 71,52 106,80 100,74 83,104.33 89.86,112.53 87.56,114
  pour Top: 67.5,166.47 67.5,25.62 111,25.62 111,166.47
  pour Bottom: 67.5,166.47 67.5,25.62 111,25.62 111,166.47
GND2  (via drill 0.35)
  other vias: 144.45,148.12 139.42,148.12 139.42,144.16 148.11,144.62 140.79,141.57 123,57 123,52 158,80 152,74 135,104.33 141.86,112.53 139.56,114
  pour Top: 119.5,166.47 119.5,25.62 163,25.62 163,166.47
  pour Bottom: 119.5,166.47 119.5,25.62 163,25.62 163,166.47
LCL-M  (via drill 0.35)
  Top 0.152: R10.1 44.72,116.77 R11.2 | R10.1 42.43,117.05 v42.43,118.04 | U6.6 39.56,115.45 42,115.45 42.71,116.16 R10.1
  Bottom 0.152: J2.1 42.45,118.06 v42.43,118.04
LCL-M1  (via drill 0.35)
  Top 0.152: R21.1 96.72,116.77 R22.2 | R21.1 94.43,117.05 v94.43,118.04 | U8.6 91.56,115.45 94,115.45 94.71,116.16 R21.1
  Bottom 0.152: J3.1 94.44,118.06 v94.43,118.04
LCL-M2  (via drill 0.35)
  Top 0.152: R32.1 148.72,116.77 R33.2 | R32.1 146.43,117.05 v146.43,118.04 | U12.6 143.56,115.45 146,115.45 146.71,116.16 R32.1
  Bottom 0.152: J5.1 146.44,118.06 v146.43,118.04
LCL-P  (via drill 0.35)
  Top 0.152: 39.02,116.77 R10.2 41.01,117.89 v41.16,118.04 | 39.02,116.77 R9.1 | U6.7 38.37,116.13 39.02,116.77
  Bottom 0.152: v41.16,118.04 41.16,121.82 J2.2
LCL-P1  (via drill 0.35)
  Top 0.152: 91.02,116.77 R21.2 93.01,117.89 v93.16,118.04 | 91.02,116.77 R20.1 | U8.7 90.37,116.13 91.02,116.77
  Bottom 0.152: v93.16,118.04 J3.2
LCL-P2  (via drill 0.35)
  Top 0.152: 143.01,116.77 R32.2 145.01,117.89 v145.16,118.04 | 143.01,116.77 R31.1 | U12.7 142.37,116.13 143.01,116.77
  Bottom 0.152: v145.16,118.04 145.16,121.82 J5.2
LDA-M  (via drill 0.35)
  Top 0.152: R7.1 31.42,116.74 R8.2 | R7.1 33.39,116.61 34,116 36.83,116 37.25,115.58 37.25,114.89 U6.9 | R7.1 v33.39,118
  Bottom 0.152: v33.39,118 33.39,121.67 J2.8
LDA-M1  (via drill 0.35)
  Top 0.152: R18.1 83.42,116.74 R19.2 | R18.1 85.39,116.61 86,116 88.83,116 89.25,115.58 89.25,114.89 U8.9 | R18.1 v85.39,118
  Bottom 0.152: v85.39,118 85.39,121.67 J3.8
LDA-M2  (via drill 0.35)
  Top 0.152: R29.1 135.42,116.74 R30.2 | R29.1 137.39,116.61 138,116 140.83,116 141.25,115.58 141.25,114.89 U12.9 | R29.1 v137.39,118
  Bottom 0.152: v137.39,118 137.39,121.67 J5.8
LDA-P  (via drill 0.35)
  Top 0.152: v34.81,117.92 35.09,117.63 R7.2 37.05,116.74 R6.1 37.87,116.07 U6.8
  Bottom 0.152: v34.81,117.92 J2.7
LDA-P1  (via drill 0.35)
  Top 0.152: v86.81,117.92 87.09,117.63 R18.2 89.05,116.74 R17.1 89.87,116.07 U8.8
  Bottom 0.152: v86.81,117.92 86.81,121.82 J3.7
LDA-P2  (via drill 0.35)
  Top 0.152: v138.81,117.92 139.09,117.63 R29.2 141.05,116.74 R28.1 141.87,116.07 U12.8
  Bottom 0.152: v138.81,117.92 138.81,121.82 J5.7
N$1
  Top 0.152: COUNT2.15 41.73,63.3 39.18,65.85 IO2.17
N$2
  Top 0.152: IO2.16 30.17,64.56 COUNT2.1
N$3
  Top 0.152: IO2.15 30.17,63.3 COUNT2.2
N$4
  Top 0.152: IO2.14 30.17,62.02 COUNT2.3
N$5
  Top 0.152: IO2.13 30.17,60.76 COUNT2.4
N$6
  Top 0.152: IO2.12 30.17,59.48 COUNT2.5
N$7
  Top 0.152: IO2.11 30.17,58.22 COUNT2.6
N$8
  Top 0.152: IO2.10 30.17,56.95 COUNT2.7
N$9  (via drill 0.35)
  Top 0.152: v35.82,53.74 35.74,53.82 IO1.17 | v41.92,51.24 43.71,51.24 COUNT1.15
  Bottom 0.152: v35.82,53.74 39.43,53.74 v41.92,51.24
N$10
  Top 0.152: IO1.16 30.17,52.56 COUNT1.1
N$11
  Top 0.152: COUNT4.15 93.73,63.3 91.18,65.85 IO4.17
N$12
  Top 0.152: IO1.15 30.17,51.3 COUNT1.2
N$13
  Top 0.152: IO1.14 30.17,50.02 COUNT1.3
N$14
  Top 0.152: IO1.13 30.17,48.75 COUNT1.4
N$15
  Top 0.152: IO1.12 30.17,47.48 COUNT1.5
N$16
  Top 0.152: IO1.11 30.17,46.22 COUNT1.6
N$17
  Top 0.152: IO1.10 30.17,44.95 COUNT1.7
N$18
  Top 0.152: COUNT1.14 43.38,50.02 40.44,47.08 40.44,45.06 30.46,35.08 IO3.12
N$19
  Top 0.152: COUNT1.13 43.38,48.75 40.92,46.3 40.92,44.27 30.46,33.81 IO3.11
N$20
  Top 0.152: COUNT1.10 42.95,44.95 30.55,32.54 IO3.10
N$21
  Top 0.152: IO4.16 82.17,64.56 COUNT4.1
N$22
  Top 0.152: IO4.15 82.17,63.3 COUNT4.2
N$23
  Top 0.406: C11.1 52.68,121.05 U5.4
N$24
  Top 0.152: IO4.14 82.17,62.02 COUNT4.3
N$25
  Top 0.152: IO4.13 82.17,60.76 COUNT4.4
N$26
  Top 0.152: IO4.12 82.17,59.48 COUNT4.5
N$27
  Top 0.152: IO4.11 82.17,58.22 COUNT4.6
N$28
  Top 0.152: IO4.10 82.17,56.95 COUNT4.7
N$29  (via drill 0.35)
  Top 0.152: v87.82,53.74 87.74,53.82 IO5.17 | v93.92,51.24 95.71,51.24 COUNT3.15
  Bottom 0.152: v87.82,53.74 91.43,53.74 v93.92,51.24
N$30
  Top 0.152: IO5.16 82.17,52.56 COUNT3.1
N$31
  Top 0.152: IO5.15 82.17,51.3 COUNT3.2
N$32
  Top 0.152: IO5.14 82.17,50.02 COUNT3.3
N$33
  Top 0.152: IO5.13 82.17,48.75 COUNT3.4
N$34
  Top 0.152: IO5.12 82.17,47.48 COUNT3.5
N$35
  Top 0.152: IO5.11 82.17,46.22 COUNT3.6
N$36
  Top 0.152: IO5.10 82.17,44.95 COUNT3.7
N$37
  Top 0.152: COUNT3.14 95.38,50.02 92.44,47.08 92.44,45.06 82.46,35.08 IO6.12
N$38
  Top 0.152: COUNT3.13 95.38,48.75 92.92,46.3 92.92,44.27 82.46,33.81 IO6.11
N$39
  Top 0.152: COUNT3.10 94.95,44.95 82.55,32.54 IO6.10
N$40
  Top 0.406: C30.1 104.68,121.05 U7.4
N$41
  Top 0.152: COUNT6.15 145.73,63.3 143.18,65.85 IO7.17
N$42
  Top 0.152: IO7.16 134.17,64.56 COUNT6.1
N$43
  Top 0.152: IO7.15 134.17,63.3 COUNT6.2
N$44
  Top 0.152: IO7.14 134.17,62.02 COUNT6.3
N$45
  Top 0.152: IO7.13 134.17,60.76 COUNT6.4
N$46
  Top 0.152: IO7.12 134.17,59.48 COUNT6.5
N$47
  Top 0.152: IO7.11 134.17,58.22 COUNT6.6
N$48
  Top 0.152: IO7.10 134.17,56.95 COUNT6.7
N$49  (via drill 0.35)
  Top 0.152: v139.82,53.74 139.74,53.82 IO8.17 | v145.92,51.24 147.71,51.24 COUNT5.15
  Bottom 0.152: v139.82,53.74 143.43,53.74 v145.92,51.24
N$50
  Top 0.152: IO8.16 134.17,52.56 COUNT5.1
N$51
  Top 0.152: IO8.15 134.17,51.3 COUNT5.2
N$52
  Top 0.152: IO8.14 134.17,50.02 COUNT5.3
N$53
  Top 0.152: IO8.13 134.17,48.75 COUNT5.4
N$54
  Top 0.152: IO8.12 134.17,47.48 COUNT5.5
N$55
  Top 0.152: IO8.11 134.17,46.22 COUNT5.6
N$56
  Top 0.152: IO8.10 134.17,44.95 COUNT5.7
N$57
  Top 0.152: COUNT5.14 147.38,50.02 144.44,47.08 144.44,45.06 134.46,35.08 IO9.12
N$58
  Top 0.152: COUNT5.13 147.38,48.75 144.93,46.3 144.93,44.27 134.46,33.81 IO9.11
N$59
  Top 0.152: COUNT5.10 146.95,44.95 134.55,32.54 IO9.10
N$60
  Top 0.406: C49.1 156.68,121.05 U11.4
RAIN
  Top 0.152: J1.B4 45.44,97.71 R5.1 45.44,103.05 C18.1 45.47,106.47 48.27,109.27 INVERTER.3
RAIN1
  Top 0.152: J4.B4 97.44,97.71 R16.1 97.44,103.05 C37.1 97.47,106.47 100.27,109.27 INVERTER1.3
RAIN2
  Top 0.152: J6.B4 149.44,97.71 R27.1 149.44,103.05 C56.1 149.47,106.47 152.27,109.27 INVERTER2.3
SCL  (via drill 0.35)
  Top 0.152: U2.8 36.85,144.84 37.41,144.28 37.41,143 37.05,142.64 U1.4 36.66,142.62 35.6,142.62 34.62,143.6 v34.35,143.6 | IO3.1 22.08,42.7 23.5,44.12 23.5,55.12 | 23.5,55.12 23.5,67.12 | 23.5,67.12 v23.5,69.12 | IO1.1 23.47,55.09 23.5,55.12 | IO2.1 23.5,67.12 | ADC.5 53,71.37 v52.5,70.87 | U6.4 38.37,109.25 34.36,105.24 R3.1 25.5,105.24 v25.41,105.15
  Bottom 0.152: v52.5,70.87 46.75,70.87 45,69.12 v23.5,69.12 25.4,71.02 v25.4,105.15 v25.41,105.15 25.41,117.04 17,125.45 17,142.85 19,144.85 33.1,144.85 v34.35,143.6
SCL1  (via drill 0.35)
  Top 0.152: U4.8 88.85,144.84 89.41,144.28 89.41,143 89.05,142.64 U3.4 88.66,142.62 87.6,142.62 86.62,143.6 v86.35,143.6 | IO6.1 74.08,42.7 75.5,44.12 75.5,55.12 | 75.5,55.12 75.5,67.12 | 75.5,67.12 v75.5,69.12 | IO5.1 75.47,55.09 75.5,55.12 | IO4.1 75.5,67.12 | ADC1.5 105,71.37 v104.5,70.87 | U8.4 90.37,109.25 86.36,105.24 R14.1 77.5,105.24 v77.41,105.15
  Bottom 0.152: v104.5,70.87 98.75,70.87 97,69.12 v75.5,69.12 77.4,71.02 v77.4,105.15 v77.41,105.15 77.41,117.04 69,125.45 69,142.85 71,144.85 85.1,144.85 v86.35,143.6
SCL2  (via drill 0.35)
  Top 0.152: U10.8 140.85,144.84 141.41,144.28 141.41,143 141.05,142.64 U9.4 140.66,142.62 139.6,142.62 138.62,143.6 v138.35,143.6 | IO9.1 126.08,42.7 127.5,44.12 127.5,55.12 | 127.5,55.12 127.5,67.12 | 127.5,67.12 v127.5,69.12 | IO8.1 127.47,55.09 127.5,55.12 | IO7.1 127.5,67.12 | ADC2.5 157,71.37 v156.5,70.87 | U12.4 142.37,109.25 138.36,105.24 R25.1 129.5,105.24 v129.41,105.15
  Bottom 0.152: v156.5,70.87 150.75,70.87 149,69.12 v127.5,69.12 129.4,71.02 v129.4,105.15 v129.41,105.15 129.41,117.04 121,125.45 121,142.85 123,144.85 137.1,144.85 v138.35,143.6
SDA  (via drill 0.35)
  Top 0.152: 35.92,145.34 35.92,146.52 U2.7 | 35.92,145.34 36.68,144.58 U1.1 36.66,144.12 | v18,68.37 18,65.85 | 18,65.85 18,53.78 | 18,53.78 18,42.46 19.03,41.43 IO3.2 | IO2.2 18,65.85 | IO1.2 18.04,53.82 18,53.78 | ADC.6 53.95,71.03 v53.02,70.1 | U6.2 37.38,109.62 34.66,106.9 R2.2 24.85,106.9 v24.8,106.85 | v34.35,145.5 35.76,145.5 35.92,145.34
  Bottom 0.152: v53.02,70.1 46.98,70.1 45.25,68.37 v18,68.37 24.8,75.17 v24.8,106.85 24.8,116.75 16.4,125.15 16.4,143.15 18.7,145.45 34.3,145.45 v34.35,145.5
SDA1  (via drill 0.35)
  Top 0.152: 87.92,145.34 87.92,146.52 U4.7 | 87.92,145.34 88.68,144.58 U3.1 88.66,144.12 | v70,68.37 70,65.85 | 70,65.85 70,53.78 | 70,53.78 70,42.46 71.03,41.43 IO6.2 | IO4.2 70,65.85 | IO5.2 70.04,53.82 70,53.78 | ADC1.6 105.95,71.03 v105.02,70.1 | U8.2 89.38,109.62 86.66,106.9 R13.2 76.85,106.9 v76.8,106.85 | v86.35,145.5 87.76,145.5 87.92,145.34
  Bottom 0.152: v105.02,70.1 98.98,70.1 97.25,68.37 v70,68.37 76.8,75.17 v76.8,106.85 76.8,116.75 68.4,125.15 68.4,143.15 70.7,145.45 86.3,145.45 v86.35,145.5
SDA2  (via drill 0.35)
  Top 0.152: 139.92,145.34 139.92,146.52 U10.7 | 139.92,145.34 140.68,144.58 U9.1 140.66,144.12 | v122,68.37 122,65.85 | 122,65.85 122,53.78 | 122,53.78 122,42.46 123.03,41.43 IO9.2 | IO7.2 122,65.85 | IO8.2 122.04,53.82 122,53.78 | ADC2.6 157.95,71.03 v157.02,70.1 | U12.2 141.38,109.62 138.66,106.9 R24.2 128.85,106.9 v128.8,106.85 | v138.35,145.5 139.76,145.5 139.92,145.34
  Bottom 0.152: v157.02,70.1 150.98,70.1 149.25,68.37 v122,68.37 128.8,75.17 v128.8,106.85 128.8,116.75 120.4,125.15 120.4,143.15 122.7,145.45 138.3,145.45 v138.35,145.5
UNREG  (via drill 0.35)
  Top 0.406: U5.3 46.58,121.05 v46.38,121.25 | U5.1 46.58,122.95 v46.38,122.75
  Bottom 0.406: v46.38,121.25 v46.38,122.75 43.13,126 39,126 38.64,125.64 38.64,122 | 38.64,122 J2.4 | J2.3 39.74,122 38.64,122
UNREG1  (via drill 0.35)
  Top 0.406: U7.3 98.58,121.05 v98.38,121.25 | U7.1 98.58,122.95 v98.38,122.75
  Bottom 0.406: v98.38,121.25 v98.38,122.75 95.13,126 91,126 90.64,125.64 90.64,122 | 90.64,122 J3.4 | J3.3 91.74,122 90.64,122
UNREG2  (via drill 0.35)
  Top 0.406: U11.3 150.58,121.05 v150.38,121.25 | U11.1 150.58,122.95 v150.38,122.75
  Bottom 0.406: v150.38,121.25 v150.38,122.75 147.13,126 143,126 142.63,125.64 142.63,122 | 142.63,122 J5.4 | J5.3 143.74,122 142.63,122
VANE
  Top 0.152: ADC.3 52.05,76.19 C15.1 51.88,77.84 | 51.88,77.84 R1.2 | J1.A5 33.21,95.79 45,84 47,84 51.88,79.12 51.88,77.84
VANE1
  Top 0.152: ADC1.3 104.05,76.19 C34.1 103.88,77.84 | 103.88,77.84 R12.2 | J4.A5 85.21,95.79 97,84 99,84 103.88,79.12 103.88,77.84
VANE2
  Top 0.152: ADC2.3 156.05,76.19 C53.1 155.88,77.84 | 155.88,77.84 R23.2 | J6.A5 137.21,95.79 149,84 151,84 155.88,79.12 155.88,77.84

## Text on the board
Top: DARWIN+WEATHER+SENSOR+PA1